# EAGLE board Current (EAGLE 6.2)
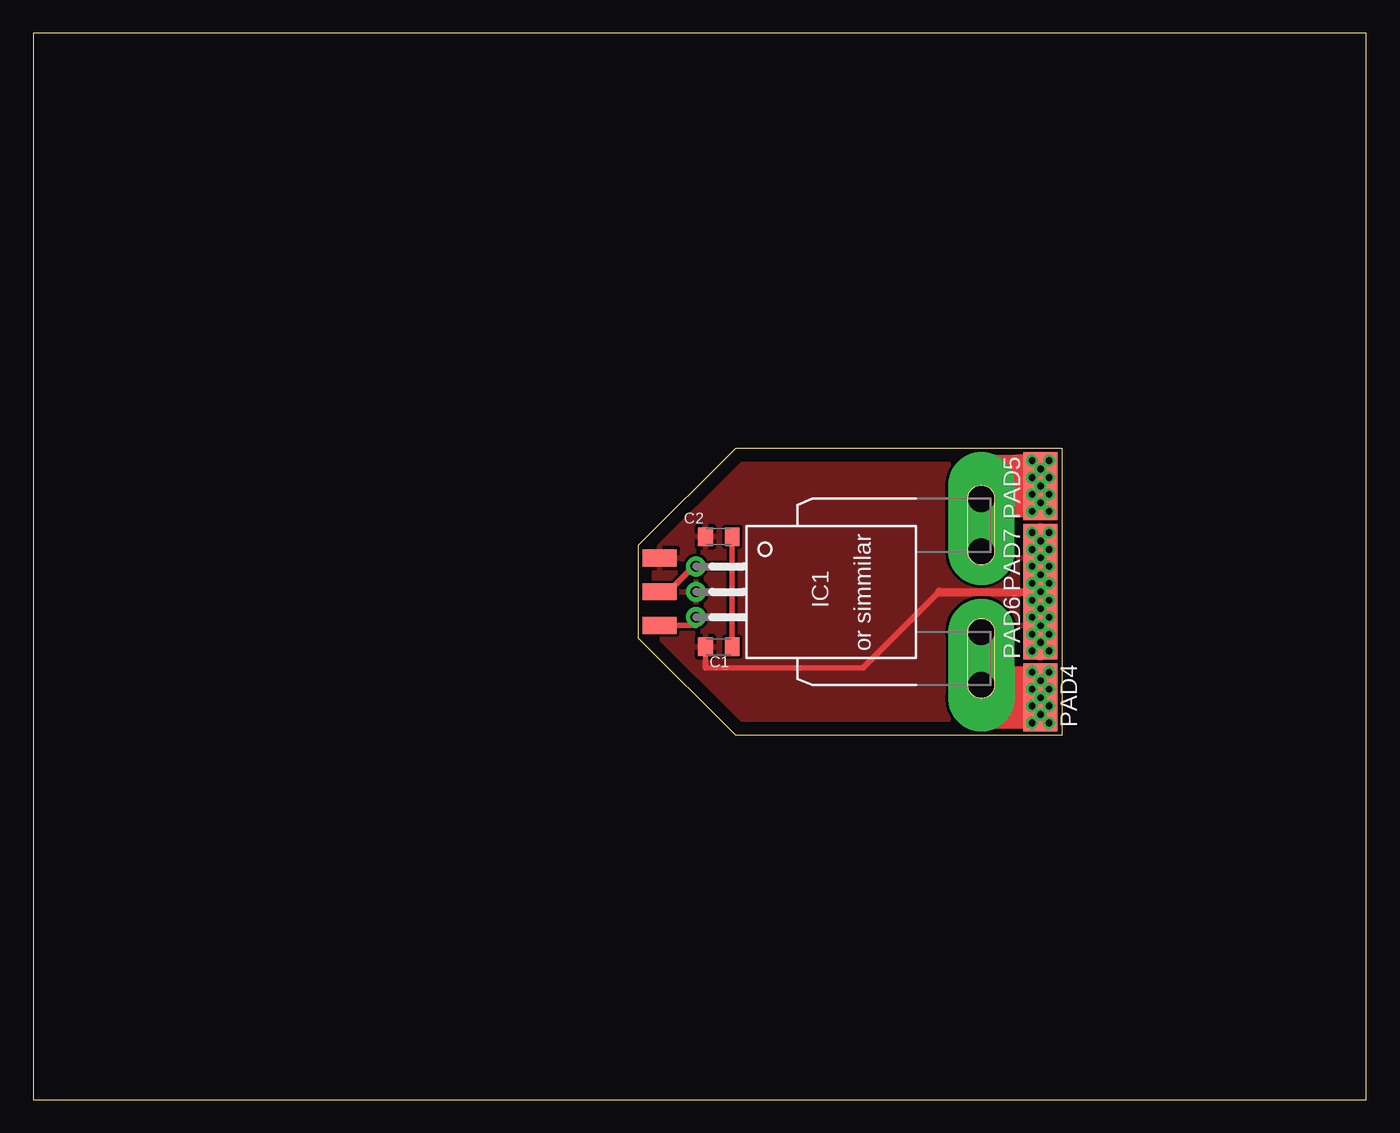
[diagram p0: board, top side]
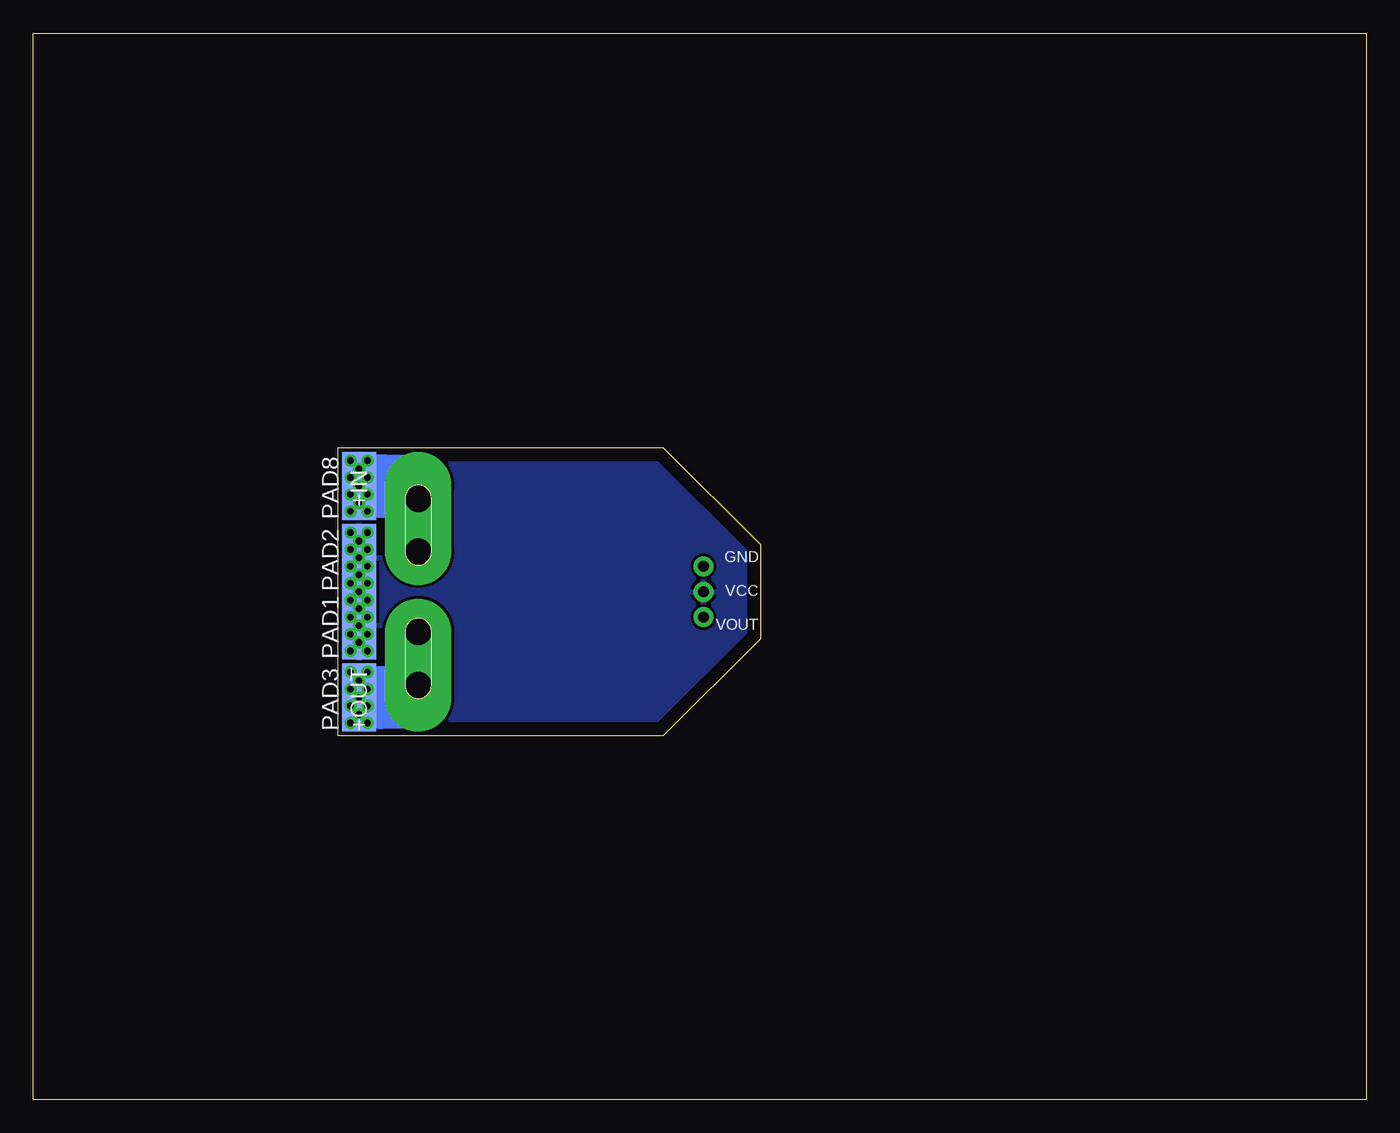
[diagram p1: board, bottom side, seen from below]

Size 100 x 80 mm. Coordinates in mm from the lower left corner, seen from the top.
Outline: 0,0 100,0 100,80 0,80 0,0
Outline: 52.7,48.9 77.15,48.9 77.15,27.3 52.7,27.3 45.4,34.61 45.4,41.59 52.7,48.9
Copper layers (1*16): Top 0.035mm / dielectric 1.5mm / Bottom 0.035mm
Design rules: minimum track width 10mil, minimum drill 24mil, track to track 8mil, track to pad 8mil, pad to pad 8mil, via to via 8mil, smd to smd 8mil, copper to edge 40mil, drill to drill 8mil, minimum pad ring 10mil, minimum via ring 8mil, stop-mask expansion 4mil, vias tented up to drill 0mil, thermal gap 10mil

## Footprints (pad centres in the part's own frame; a part is rotated, then mirrored left to right if it is on the bottom)
C0805K = smd 1.1 x 1.4: 1 -1,0; 2 1,0
SMD1,27-2,54 = smd 1.27 x 2.54: 1 0,0
CB-PFF = drill 0.8 pad 1.5: 1 -1.91,-21.4; 2 0,-21.4; 3 1.91,-21.4 | drill 2 pad 5 offset: 4 3,0; 5 -3,0 | drill 2 pad 4 offset: IP+1 7,0; IP-1 -7,0
SMD2,54-5,08 = smd 2.54 x 5.08: 1 0,0

## Placement (x,y rotation side)
C1  [C0805K]  51.44,33.97 0 top
C2  [C0805K]  51.44,42.23 0 top
GND  [SMD1,27-2,54]  46.99,40.64 90 top
IC1  ACS758ECB-200B-PFF-T  [CB-PFF]  71.12,38.1 270 top
PAD1  [SMD2,54-5,08]  75.56,35.56 0 bottom
PAD2  [SMD2,54-5,08]  75.56,40.64 0 bottom
PAD3  [SMD2,54-5,08]  75.56,30.16 0 bottom
PAD4  [SMD2,54-5,08]  75.56,30.16 180 top
PAD5  [SMD2,54-5,08]  75.56,46.04 0 top
PAD6  [SMD2,54-5,08]  75.56,35.56 0 top
PAD7  [SMD2,54-5,08]  75.56,40.64 0 top
PAD8  [SMD2,54-5,08]  75.56,46.04 0 bottom
VCC  [SMD1,27-2,54]  46.99,38.1 90 top
VOUT  [SMD1,27-2,54]  46.99,35.56 90 top

## Library data of the parts
C1 C2 = adafruit
GND PAD1-PAD8 VCC VOUT = wirepad
IC1 = allegro; MPN: ACS758ECB-200B-PFF-T; OC_FARNELL: 1718993; OC_NEWARK: 04R7127

## Nets
5: C1.1 C2.1 GND.1 IC1.2 PAD1.1 PAD2.1 PAD6.1 PAD7.1
N$1: IC1.4 PAD3.1 PAD4.1
N$2: IC1.5 PAD5.1 PAD8.1
N$3: C1.2 C2.2 IC1.1 VCC.1
N$4: IC1.3 VOUT.1

## Tracks (layer width: path | path; a pad name or v marks a point on that pad's centre or on a via)
5  (via drill 0.5)
  Top 0.406: C1.1 50.44,32.43 50.48,32.38 62.23,32.38 67.94,38.1
  Top 0.61: 67.94,38.1 75.25,38.1 75.56,37.78 PAD2.1
  Bottom 0.406: PAD2.1 PAD1.1
  other vias: 75.56,40.64 75.56,35.56
  pour Top: 40.96,58.74 40.96,24.13 83.82,24.13 83.82,58.74
  pour Bottom: 40.96,54.61 40.96,25.4 81.6,25.4 81.6,54.61
N$1  (via drill 0.5)
  Top 2.184: PAD3.1 74.93,30.16 | 74.93,30.16 v74.93,29.53 74.93,28.89 71.44,28.89 71.44,31.43 75.25,31.43 75.25,31.11 74.93,31.11 v74.93,30.8 74.93,30.16 | 74.93,30.16 71.12,30.16 IC1.4
  Bottom 2.184: 73.98,31.43 73.98,28.89 | 70.8,28.89 73.98,28.89 | IC1.4 71.12,28.89 70.48,28.89 70.48,35.24 72.39,35.24 72.39,30.48 72.71,30.48 72.71,31.43 v75.56,31.43 PAD3.1 v75.56,28.89 73.98,28.89
  other vias: 75.56,30.16
N$2  (via drill 0.5)
  Top 2.184: PAD8.1 v75.56,44.77 73.34,44.77 73.34,45.09 75.56,45.09 PAD8.1 | PAD8.1 v75.56,47.31 73.98,47.31 | 73.98,47.31 71.12,47.31 71.12,46.04 | 73.98,47.31 73.98,46.04 71.12,46.04 | 71.12,46.04 71.12,40.96 71.75,40.96 71.75,46.67 v74.93,46.67 75.56,46.67 PAD8.1
  Bottom 2.184: v75.56,47.31 PAD8.1 v75.56,44.77 73.66,44.77 73.66,47.31 | 73.66,47.31 74.93,47.31 | 73.66,47.31 71.12,47.31 IC1.5
  other vias: 75.56,46.04
N$3
  Top 0.406: VCC.1 47.62,38.1 49.53,40.01 IC1.1 52.44,40.01 C1.2 C2.2
N$4
  Top 0.406: IC1.3 49.72,35.56 VOUT.1
N$6  (via drill 0.5)
  other vias: 74.93,47.94
N$7  (via drill 0.5)
  other vias: 76.2,47.94
N$8  (via drill 0.5)
  other vias: 76.2,46.67
N$9  (via drill 0.5)
  other vias: 74.93,45.4
N$10  (via drill 0.5)
  other vias: 76.2,45.4
N$11  (via drill 0.5)
  other vias: 74.93,44.13
N$12  (via drill 0.5)
  other vias: 76.2,44.13
N$13  (via drill 0.5)
  other vias: 74.93,42.55
N$14  (via drill 0.5)
  other vias: 76.2,42.55
N$15  (via drill 0.5)
  other vias: 75.56,41.91
N$16  (via drill 0.5)
  other vias: 74.93,41.27
N$17  (via drill 0.5)
  other vias: 76.2,41.27
N$18  (via drill 0.5)
  other vias: 74.93,40.01
N$19  (via drill 0.5)
  other vias: 76.2,40.01
N$20  (via drill 0.5)
  other vias: 74.93,38.73
N$21  (via drill 0.5)
  other vias: 76.2,38.73
N$22  (via drill 0.5)
  other vias: 74.93,37.47
N$23  (via drill 0.5)
  other vias: 76.2,37.47
N$24  (via drill 0.5)
  other vias: 74.93,36.2
N$25  (via drill 0.5)
  other vias: 76.2,36.2
N$26  (via drill 0.5)
  other vias: 74.93,34.92
N$27  (via drill 0.5)
  other vias: 76.2,34.92
N$28  (via drill 0.5)
  other vias: 75.56,34.29
N$29  (via drill 0.5)
  other vias: 74.93,33.66
N$30  (via drill 0.5)
  other vias: 76.2,33.66
N$31  (via drill 0.5)
  other vias: 74.93,32.07
N$32  (via drill 0.5)
  other vias: 76.2,32.07
N$33  (via drill 0.5)
  other vias: 76.2,30.8
N$34  (via drill 0.5)
  other vias: 76.2,29.53
N$35  (via drill 0.5)
  other vias: 74.93,28.26
N$36  (via drill 0.5)
  other vias: 76.2,28.26
N$37  (via drill 0.5)
  other vias: 75.56,36.83
N$38  (via drill 0.5)
  other vias: 75.56,38.1
N$39  (via drill 0.5)
  other vias: 75.56,39.37

## Text on the board
tNames: or simmilar
bNames: +IN | +OUT